# Allegro board board3.brd
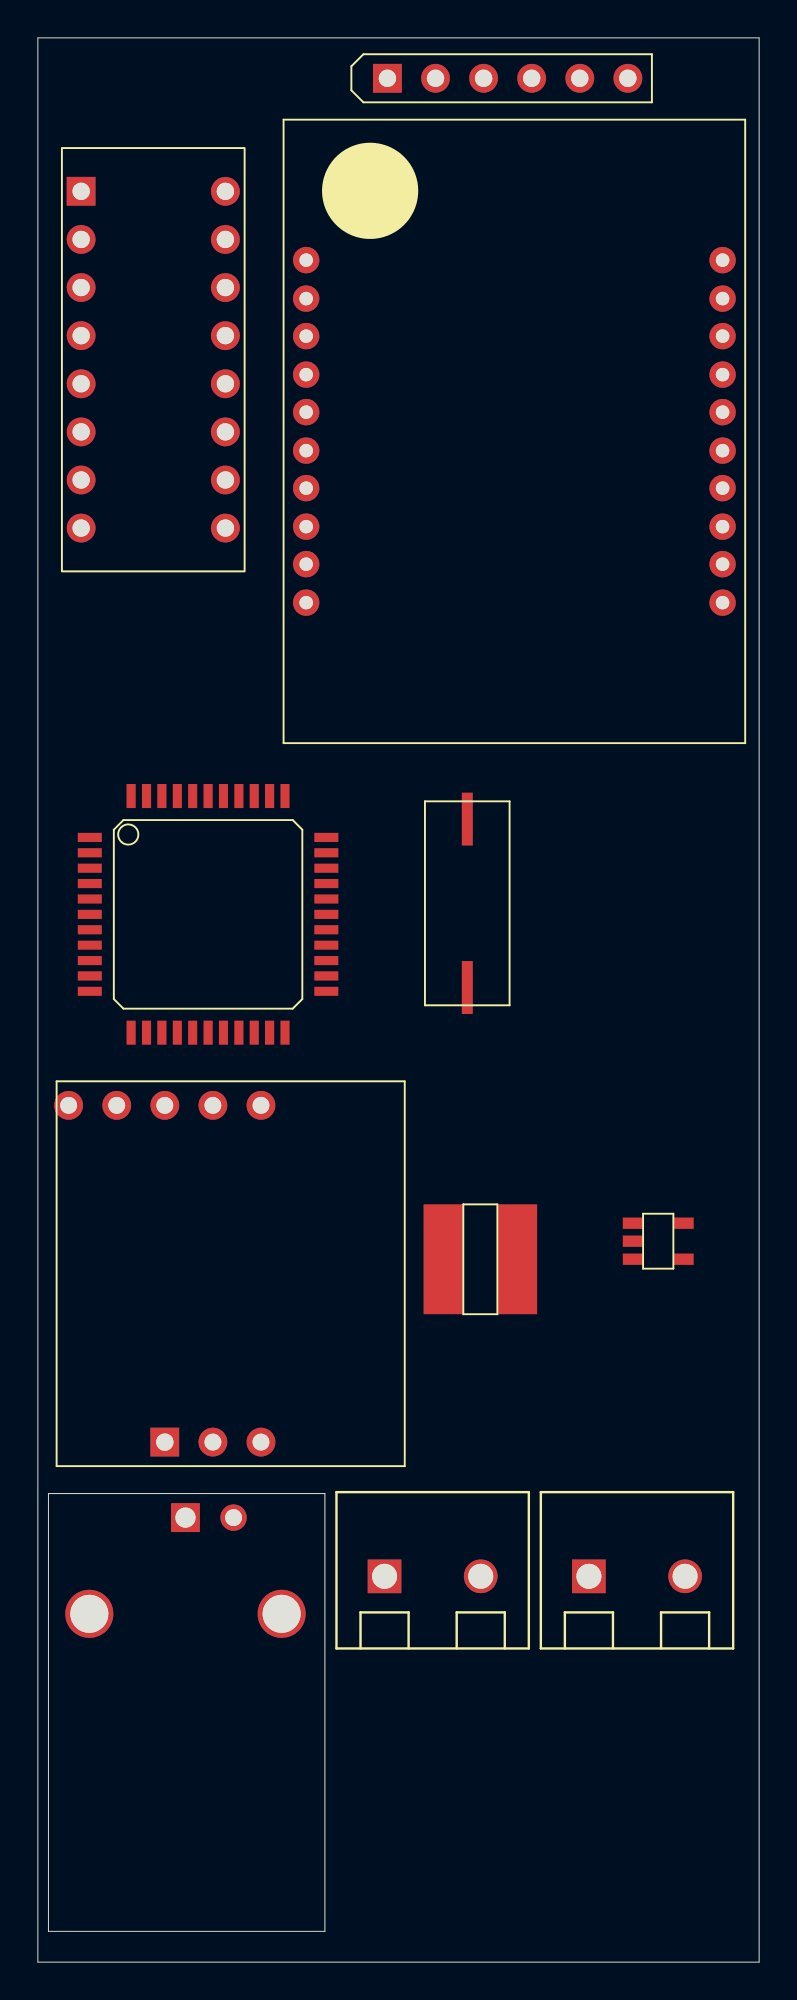
[diagram p0: board, top side]
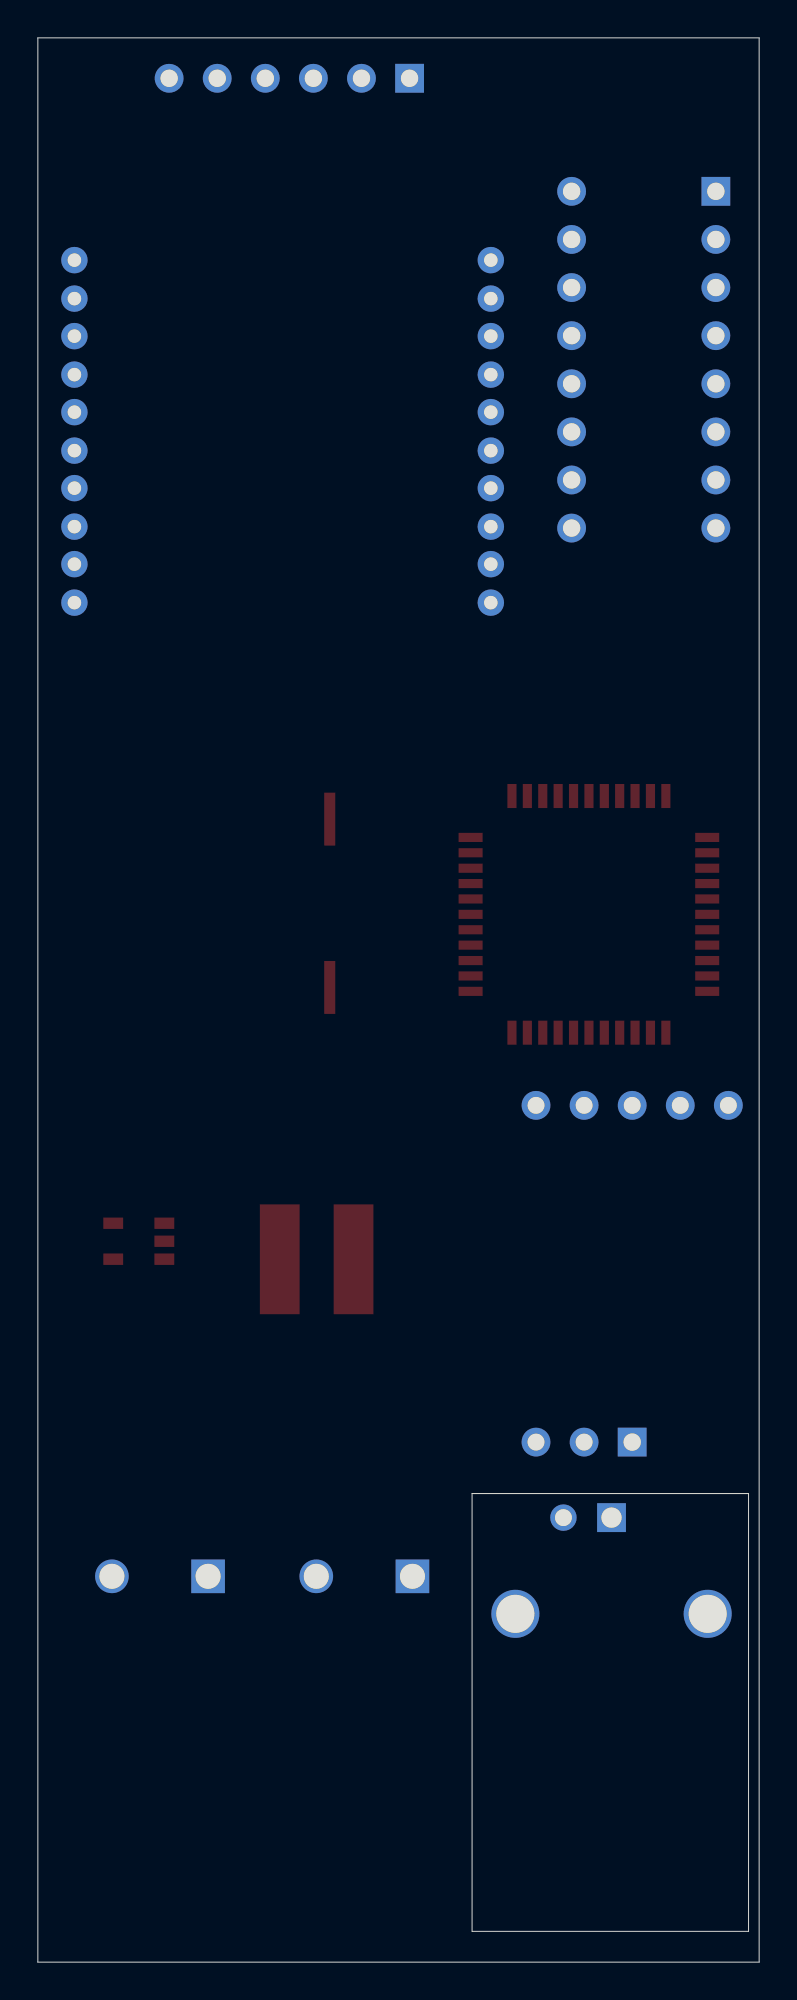
[diagram p1: board, bottom side, seen from below]

Outline 38.1 x 101.6 mm; copper layers: TOP, BOTTOM. Coordinates in mm from the lower left corner of the outline.
Outline path: 0,101.6 38.1,101.6 38.1,0 0,0 0,101.6

## Placement (name value [footprint] x y rotation side)
J1  HEADER 2  [CONNECTEUR_2_200]  18.31 20.37 0 top
J2  Convertion Board  [CONDUCTIVITY_SENSOR]  0.99 26.19 90 top
J3  BNC au capteur  [CONNECTEUR_BNC]  0.56 24.74 270 top
J4  Xbee  [XBEE]  25.17 80.82 0 top
J5  Connecteur PicKit  [SIP6]  18.47 99.47 90 top
J6  contact eau  [CONNECTEUR_2_200]  29.11 20.37 0 top
L1  10uH  [BOBINE10U100MH]  25.32 37.11 180 top
SW1  SW DIP-8  [DIPSWITCH]  2.29 93.5 0 top
U1  LM104/TO  [TPS560200]  31.42 39.01 0 top
U2  PIC18F47J13  [PQFP44]  8.99 55.32 0 top
Y1  4Mhz CRYSTAL  [CRYSTAL_SMD]  22.68 55.91 270 top

## Library data of the parts
J1 J6 = HEADER 2
J2 = HEADER 3X2_3
J3 = BNC
J4 = HEADER 11X2_1
J5 = HEADER 6_0: User Part Number: ***
L1 = INDUCTOR
SW1 = SW DIP-8: User Part Number: ***
U1 = LM104/TO_3
U2 = PIC16C67_1: Tolerance: ***; User Part Number: ***
Y1 = CRYSTAL

## Footprints (pads in the part's own frame, mm; a bottom-side part is the same pattern mirrored in y, then rotated)
BOBINE10U100MH
  rect 2.1x5.8 smd: 1(0,0) 2(3.9,0)
CONDUCTIVITY_SENSOR
  rect 1.524x1.524 hole 0.914: 1(1.27,-5.715)
  round 1.524 hole 0.889: 2(1.27,-8.255) 3(1.27,-10.795) 4(19.05,-10.795) 5(19.05,-8.255) 6(19.05,-5.715) 7(19.05,-3.175) 8(19.05,-0.635)
CONNECTEUR_2_200
  rect 1.778x1.778 hole 1.321: 1(0,0)
  round 1.778 hole 1.321: 2(5.08,0)
CONNECTEUR_BNC
  round 2.54 hole 2.007: (6.35,12.319) (6.35,2.159)
  rect 1.524x1.524 hole 1.067: 1(1.27,7.239)
  round 1.397 hole 0.889: 2(1.27,9.779)
CRYSTAL_SMD
  rect 2.794x0.584 smd: 1(-4.445,0) 2(4.445,0)
DIPSWITCH
  rect 1.524x1.524 hole 0.914: 1(0,0)
  round 1.524 hole 0.914: 2(0,-2.54) 3(0,-5.08) 4(0,-7.62) 5(0,-10.16) 6(0,-12.7) 7(0,-15.24) 8(0,-17.78) 9(7.62,-17.78) 10(7.62,-15.24) 11(7.62,-12.7) 12(7.62,-10.16) 13(7.62,-7.62) 14(7.62,-5.08) 15(7.62,-2.54) 16(7.62,0)
PQFP44
  rect 1.27x0.483 smd: 1(-6.248,4.064) 2(-6.248,3.251) 3(-6.248,2.438) 4(-6.248,1.626) 5(-6.248,0.813) 6(-6.248,0) 7(-6.248,-0.813) 8(-6.248,-1.626) 9(-6.248,-2.438) 10(-6.248,-3.251) 11(-6.248,-4.064) 23(6.248,-4.064) 24(6.248,-3.251) 25(6.248,-2.438) 26(6.248,-1.626) 27(6.248,-0.813) 28(6.248,0) 29(6.248,0.813) 30(6.248,1.626) 31(6.248,2.438) 32(6.248,3.251) 33(6.248,4.064)
  rect 0.483x1.27 smd: 12(-4.064,-6.248) 13(-3.251,-6.248) 14(-2.438,-6.248) 15(-1.626,-6.248) 16(-0.813,-6.248) 17(0,-6.248) 18(0.813,-6.248) 19(1.626,-6.248) 20(2.438,-6.248) 21(3.251,-6.248) 22(4.064,-6.248) 34(4.064,6.248) 35(3.251,6.248) 36(2.438,6.248) 37(1.626,6.248) 38(0.813,6.248) 39(0,6.248) 40(-0.813,6.248) 41(-1.626,6.248) 42(-2.438,6.248) 43(-3.251,6.248) 44(-4.064,6.248)
SIP6
  rect 1.524x1.524 hole 0.914: 1(0,0)
  round 1.524 hole 0.914: 2(0,-2.54) 3(0,-5.08) 4(0,-7.62) 5(0,-10.16) 6(0,-12.7)
TPS560200
  rect 1.05x0.6 smd: 1(0,0) 2(0,-0.95) 3(0,-1.9) 4(2.7,-1.9) 5(2.7,0)
XBEE
  round 1.397 hole 0.711: 1(-10.998,9.042) 2(-10.998,7.01) 3(-10.998,5.029) 4(-10.998,2.997) 5(-10.998,1.016) 6(-10.998,-1.016) 7(-10.998,-2.997) 8(-10.998,-5.029) 9(-10.998,-7.01) 10(-10.998,-9.042) 11(10.998,-9.042) 12(10.998,-7.01) 13(10.998,-5.029) 14(10.998,-2.997) 15(10.998,-1.016) 16(10.998,1.016) 17(10.998,2.997) 18(10.998,5.029) 19(10.998,7.01) 20(10.998,9.042)

## Nets
3.3V: J2.1 J4.2 J5.2 L1.2 U2.7(VDD1) U2.22(RA3) U2.28(VDD2)
4.2V(PILE): J1.1 U1.4(VIN)
GND: J1.2 J2.4(GND) J4.1 J4.10 J5.3 J6.2 SW1.9(B8) SW1.10(B7) SW1.11(B6) SW1.12(B5) SW1.13(B4) SW1.14(B3) SW1.15(B2) SW1.16(B1) U1.2(GND) U2.6(VSS1) U2.21(RA2) U2.29(VSS2)
CAPTEURRX: J2.6 U2.14(RB4)
CAPTEURTX: J2.5 U2.15(RB5)
ENABLE POWER: U1.1(EN) U2.26(RE1)
RB2: J2.8 U2.10(RB2)
RB3: J2.7 U2.11(RB3)
VOLT PILE: U2.27(RE2)
XBEEDIN: J4.4 U2.1(RC7)
XBEEDOUT: J4.3 U2.44(RC6)
XBEERESET: J4.6 U2.36(RC2)
XBEESLEEP: J4.9 U2.25(RE0)
N45185: U2.23(VDDCORE)
N45221: J5.5 U2.16(RB6)
N45265: J5.4 U2.17(RB7)
N45305: J5.1 U2.18(M\C\L\R\)
N56544: SW1.1(A1) U2.5(RD7)
N56546: SW1.2(A2) U2.4(RD6)
N56548: SW1.3(A3) U2.3(RD5)
N56550: SW1.4(A4) U2.2(RD4)
N56552: SW1.5(A5) U2.41(RD3)
N56554: SW1.6(A6) U2.40(RD2)
N56556: SW1.7(A7) U2.39(RD1/SDA2)
N56558: SW1.8(A8) U2.38(RD0/SCL2)
N61373: J2.2 J3.1(CENTER)
N61405: J2.3 J3.2(SHIELD)
N78069: U2.30(OSC1/RA7) Y1.2
N78169: U2.31(OSC2/RA6) Y1.1
N80519: J6.1 U2.9(RB1)
N82912: U1.5(VSENSE)
N83047: L1.1 U1.3(PH)

Pads without a net: J4 5 7 8 11 12 13 14 15 16 17 18 19 20; J5 6; U2 8 12 13 19 20 24 32 33 34 35 37 42 43
